# EAGLE board Distribution_board (EAGLE 8.0.1)
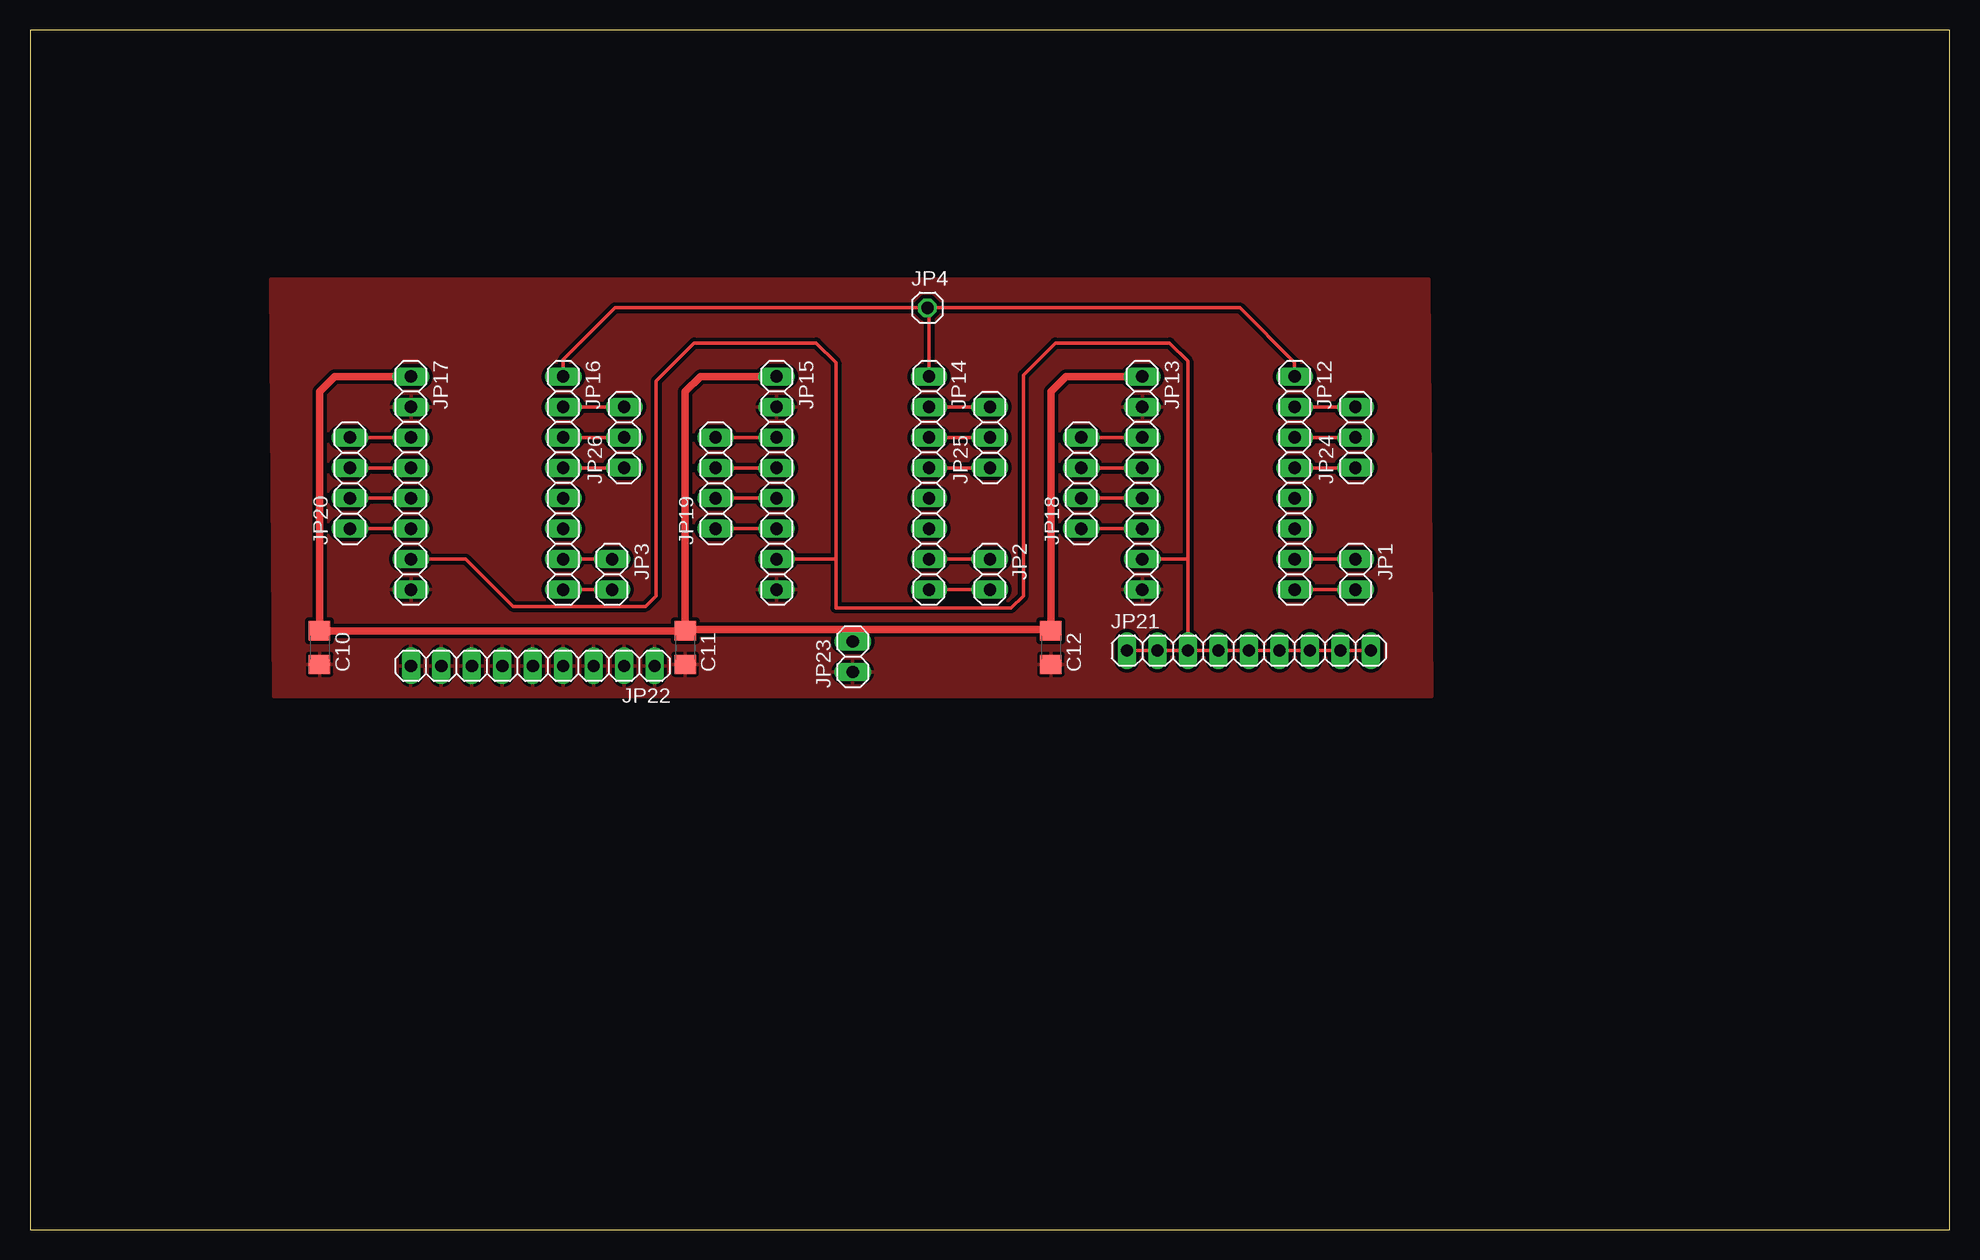
[diagram p0: board, top side]

Size 160 x 100 mm. Coordinates in mm from the lower left corner, seen from the top.
Outline: 0,0 160,0 160,100 0,100 0,0
Copper layers (1*16): Top 0.035mm / dielectric 1.5mm / Bottom 0.035mm
Design rules "default": minimum track width 10mil, minimum drill 24mil, track to track 8mil, track to pad 8mil, pad to pad 8mil, via to via 8mil, smd to smd 8mil, copper to edge 40mil, drill to drill 8mil, minimum pad ring 10mil, minimum via ring 8mil, stop-mask expansion 4mil, vias tented up to drill 0mil, thermal gap 10mil

## Footprints (pad centres in the part's own frame; a part is rotated, then mirrored left to right if it is on the bottom)
C1206 = smd 1.6 x 1.8: 1 -1.4,0; 2 1.4,0
1X02 = drill 1.016 long: 1 -1.27,0; 2 1.27,0
1X01 = drill 1.016 octagon: 1 0,0
1X08 = drill 1.016 long: 1 -8.89,0; 2 -6.35,0; 3 -3.81,0; 4 -1.27,0; 5 1.27,0; 6 3.81,0; 7 6.35,0; 8 8.89,0
1X04 = drill 1.016 long: 1 -3.81,0; 2 -1.27,0; 3 1.27,0; 4 3.81,0
1X09 = drill 1.016 long: 1 -10.16,0; 2 -7.62,0; 3 -5.08,0; 4 -2.54,0; 5 0,0; 6 2.54,0; 7 5.08,0; 8 7.62,0; 9 10.16,0
1X03 = drill 1.016 long: 1 -2.54,0; 2 0,0; 3 2.54,0

## Placement (x,y rotation side)
C10  100uF  [C1206]  24.13,48.51 270 top
C11  100uF  [C1206]  54.61,48.51 270 top
C12  100uF  [C1206]  85.09,48.51 270 top
JP1  [1X02]  110.49,54.61 270 top
JP2  [1X02]  80.01,54.61 270 top
JP3  [1X02]  48.51,54.61 270 top
JP4  [1X01]  74.8,76.83 0 top
JP12  X1  [1X08]  105.41,62.23 270 top
JP13  X2  [1X08]  92.71,62.23 270 top
JP14  Y1  [1X08]  74.93,62.23 270 top
JP15  Y2  [1X08]  62.23,62.23 270 top
JP16  Z1  [1X08]  44.45,62.23 270 top
JP17  Z2  [1X08]  31.75,62.23 270 top
JP18  Xout  [1X04]  87.63,62.23 90 top
JP19  Yout  [1X04]  57.15,62.23 90 top
JP20  Zout  [1X04]  26.67,62.23 90 top
JP21  [1X09]  101.6,48.26 0 top
JP22  [1X09]  41.91,46.99 180 top
JP23  MotorPW  [1X02]  68.58,47.75 90 top
JP24  [1X03]  110.49,66.04 90 top
JP25  [1X03]  80.01,66.04 90 top
JP26  [1X03]  49.53,66.04 90 top

## Library data of the parts
C10-C12 = fab
JP1-JP4 JP12-JP26 = pinhead

## Nets
ENABLE: JP4.1 JP12.1 JP14.1 JP16.1
GND: C10.2 C11.2 C12.2 JP13.2 JP13.8 JP15.2 JP15.8 JP17.2 JP17.8 JP22.1 JP22.2 JP22.3 JP22.4 JP22.5 JP22.6 JP22.7 JP22.8 JP22.9 JP23.1
N$19: JP17.3 JP20.4
N$25: JP17.4 JP20.3
N$31: JP17.5 JP20.2
N$32: JP17.6 JP20.1
N$33: JP15.6 JP19.1
N$34: JP15.5 JP19.2
N$35: JP15.4 JP19.3
N$36: JP15.3 JP19.4
N$37: JP13.3 JP18.4
N$38: JP13.4 JP18.3
N$39: JP13.5 JP18.2
N$40: JP13.6 JP18.1
N$41: JP12.2 JP24.3
N$42: JP12.3 JP24.2
N$43: JP12.4 JP24.1
N$44: JP14.2 JP25.3
N$45: JP14.3 JP25.2
N$46: JP14.4 JP25.1
N$47: JP16.2 JP26.3
N$48: JP16.3 JP26.2
N$49: JP16.4 JP26.1
VCC: JP13.7 JP15.7 JP17.7 JP21.1 JP21.2 JP21.3 JP21.4 JP21.5 JP21.6 JP21.7 JP21.8 JP21.9
VMOT: C10.1 C11.1 C12.1 JP13.1 JP15.1 JP17.1 JP23.2
XDIR: JP1.2 JP12.8
XSTEP: JP1.1 JP12.7
YDIR: JP2.2 JP14.8
YSTEP: JP2.1 JP14.7
ZDIR: JP3.2 JP16.8
ZSTEP: JP3.1 JP16.7

## Tracks (layer width: path | path; a pad name or v marks a point on that pad's centre or on a via)
ENABLE
  Top 0.305: JP4.1 48.77,76.83 44.45,72.52 JP16.1 | JP4.1 100.84,76.83 105.41,72.26 JP12.1 | JP4.1 74.93,76.71 JP14.1
GND
  pour Top (isolate 0.305): 20.07,79.25 116.59,79.25 116.84,44.45 20.32,44.45
N$19
  Top 0.305: JP20.4 JP17.3
N$25
  Top 0.305: JP20.3 JP17.4
N$31
  Top 0.305: JP20.2 JP17.5
N$32
  Top 0.305: JP20.1 JP17.6
N$33
  Top 0.305: JP19.1 JP15.6
N$34
  Top 0.305: JP19.2 JP15.5
N$35
  Top 0.305: JP19.3 JP15.4
N$36
  Top 0.305: JP19.4 JP15.3
N$37
  Top 0.305: JP18.4 JP13.3
N$38
  Top 0.305: JP18.3 JP13.4
N$39
  Top 0.305: JP18.2 JP13.5
N$40
  Top 0.305: JP18.1 JP13.6
N$41
  Top 0.305: JP24.3 JP12.2
N$42
  Top 0.305: JP12.3 JP24.2
N$43
  Top 0.305: JP12.4 JP24.1
N$44
  Top 0.305: JP25.3 JP14.2
N$45
  Top 0.305: JP14.3 JP25.2
N$46
  Top 0.305: JP25.1 JP14.4
N$47
  Top 0.305: JP16.2 JP26.3
N$48
  Top 0.305: JP16.3 JP26.2
N$49
  Top 0.305: JP16.4 JP26.1
VCC
  Top 0.305: JP21.1 JP21.2 JP21.3 | JP21.3 JP21.4 JP21.5 JP21.6 JP21.7 JP21.8 JP21.9 | 96.52,55.88 JP13.7 | 96.52,55.88 JP21.3 | JP17.7 36.32,55.88 40.26,51.94 51.31,51.94 52.2,52.83 52.2,70.74 55.37,73.91 65.53,73.91 67.18,72.26 67.18,55.88 | 67.18,55.88 JP15.7 | 67.18,55.88 67.18,51.82 81.79,51.82 82.8,52.83 82.8,71.25 85.47,73.91 95,73.91 96.52,72.39 96.52,55.88
VMOT
  Top 0.61: JP17.1 25.4,71.12 24.13,69.85 C10.1 C11.1 | C11.1 54.74,50.04 68.58,50.04 | 68.58,50.04 84.96,50.04 C12.1 85.09,69.85 86.36,71.12 JP13.1 | JP23.2 68.58,50.04 | JP15.1 55.88,71.12 54.61,69.85 C11.1
XDIR
  Top 0.305: JP12.8 JP1.2
XSTEP
  Top 0.305: JP1.1 JP12.7
YDIR
  Top 0.305: JP2.2 JP14.8
YSTEP
  Top 0.305: JP2.1 JP14.7
ZDIR
  Top 0.305: JP16.8 JP3.2
ZSTEP
  Top 0.305: JP3.1 JP16.7